# Altium PCB Paw2.PcbDoc
Units mil, origin at the board's own origin, x right, y up, seen from the top; angles counter-clockwise.
Board outline 2010 x 2010 mil, 4 copper layers (Top Layer, Internal Plane 1, Internal Plane 2, Bottom Layer); 42 components, 69 nets, 203 pads, 0 vias.
Unrouted connection lines stored in the file: 127.
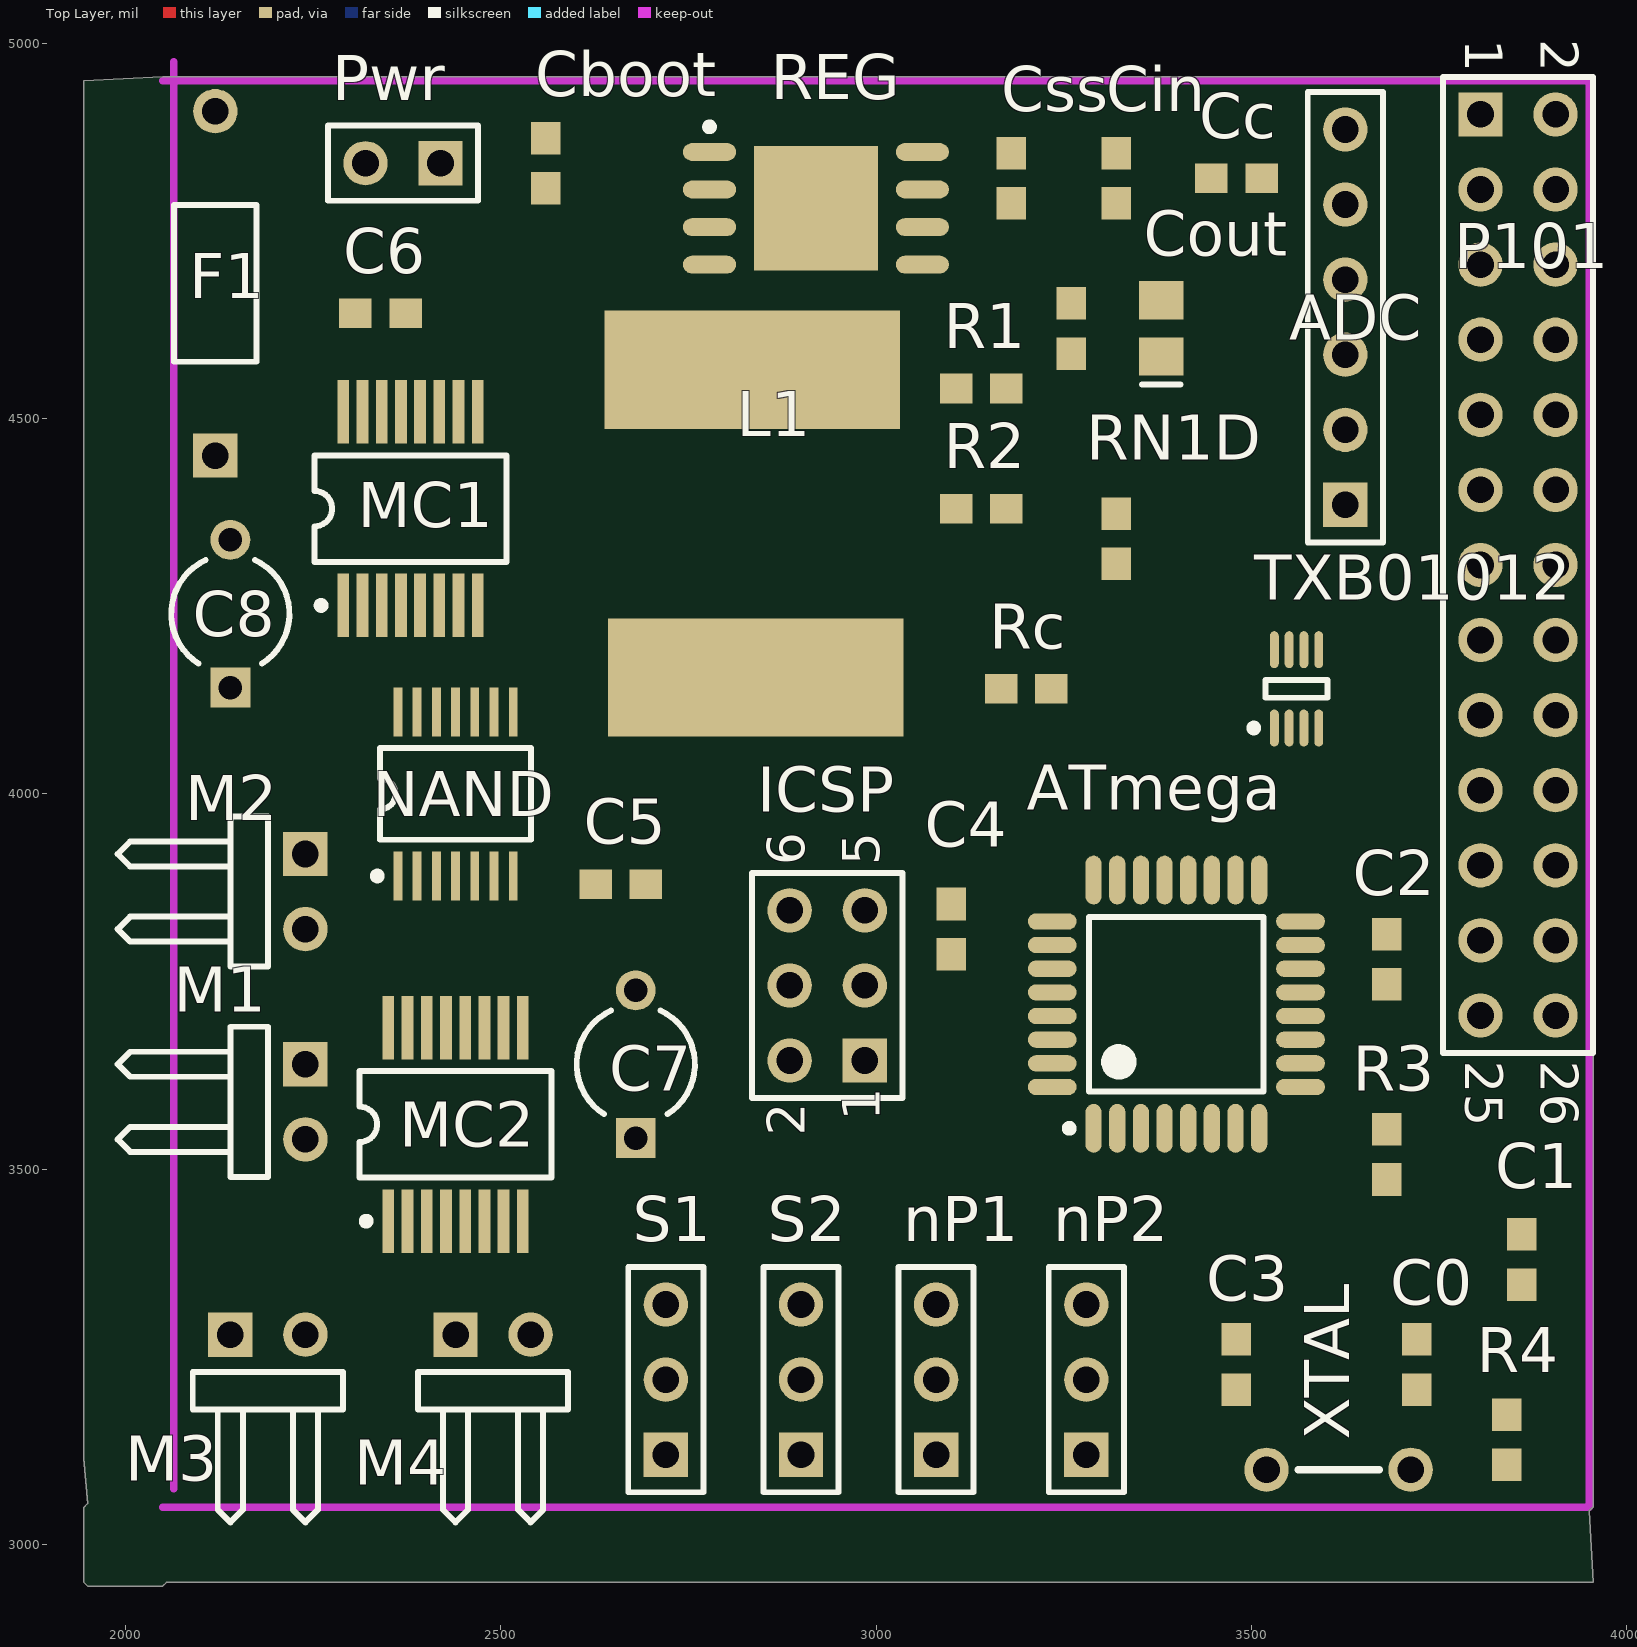
[diagram p0: Top Layer view]
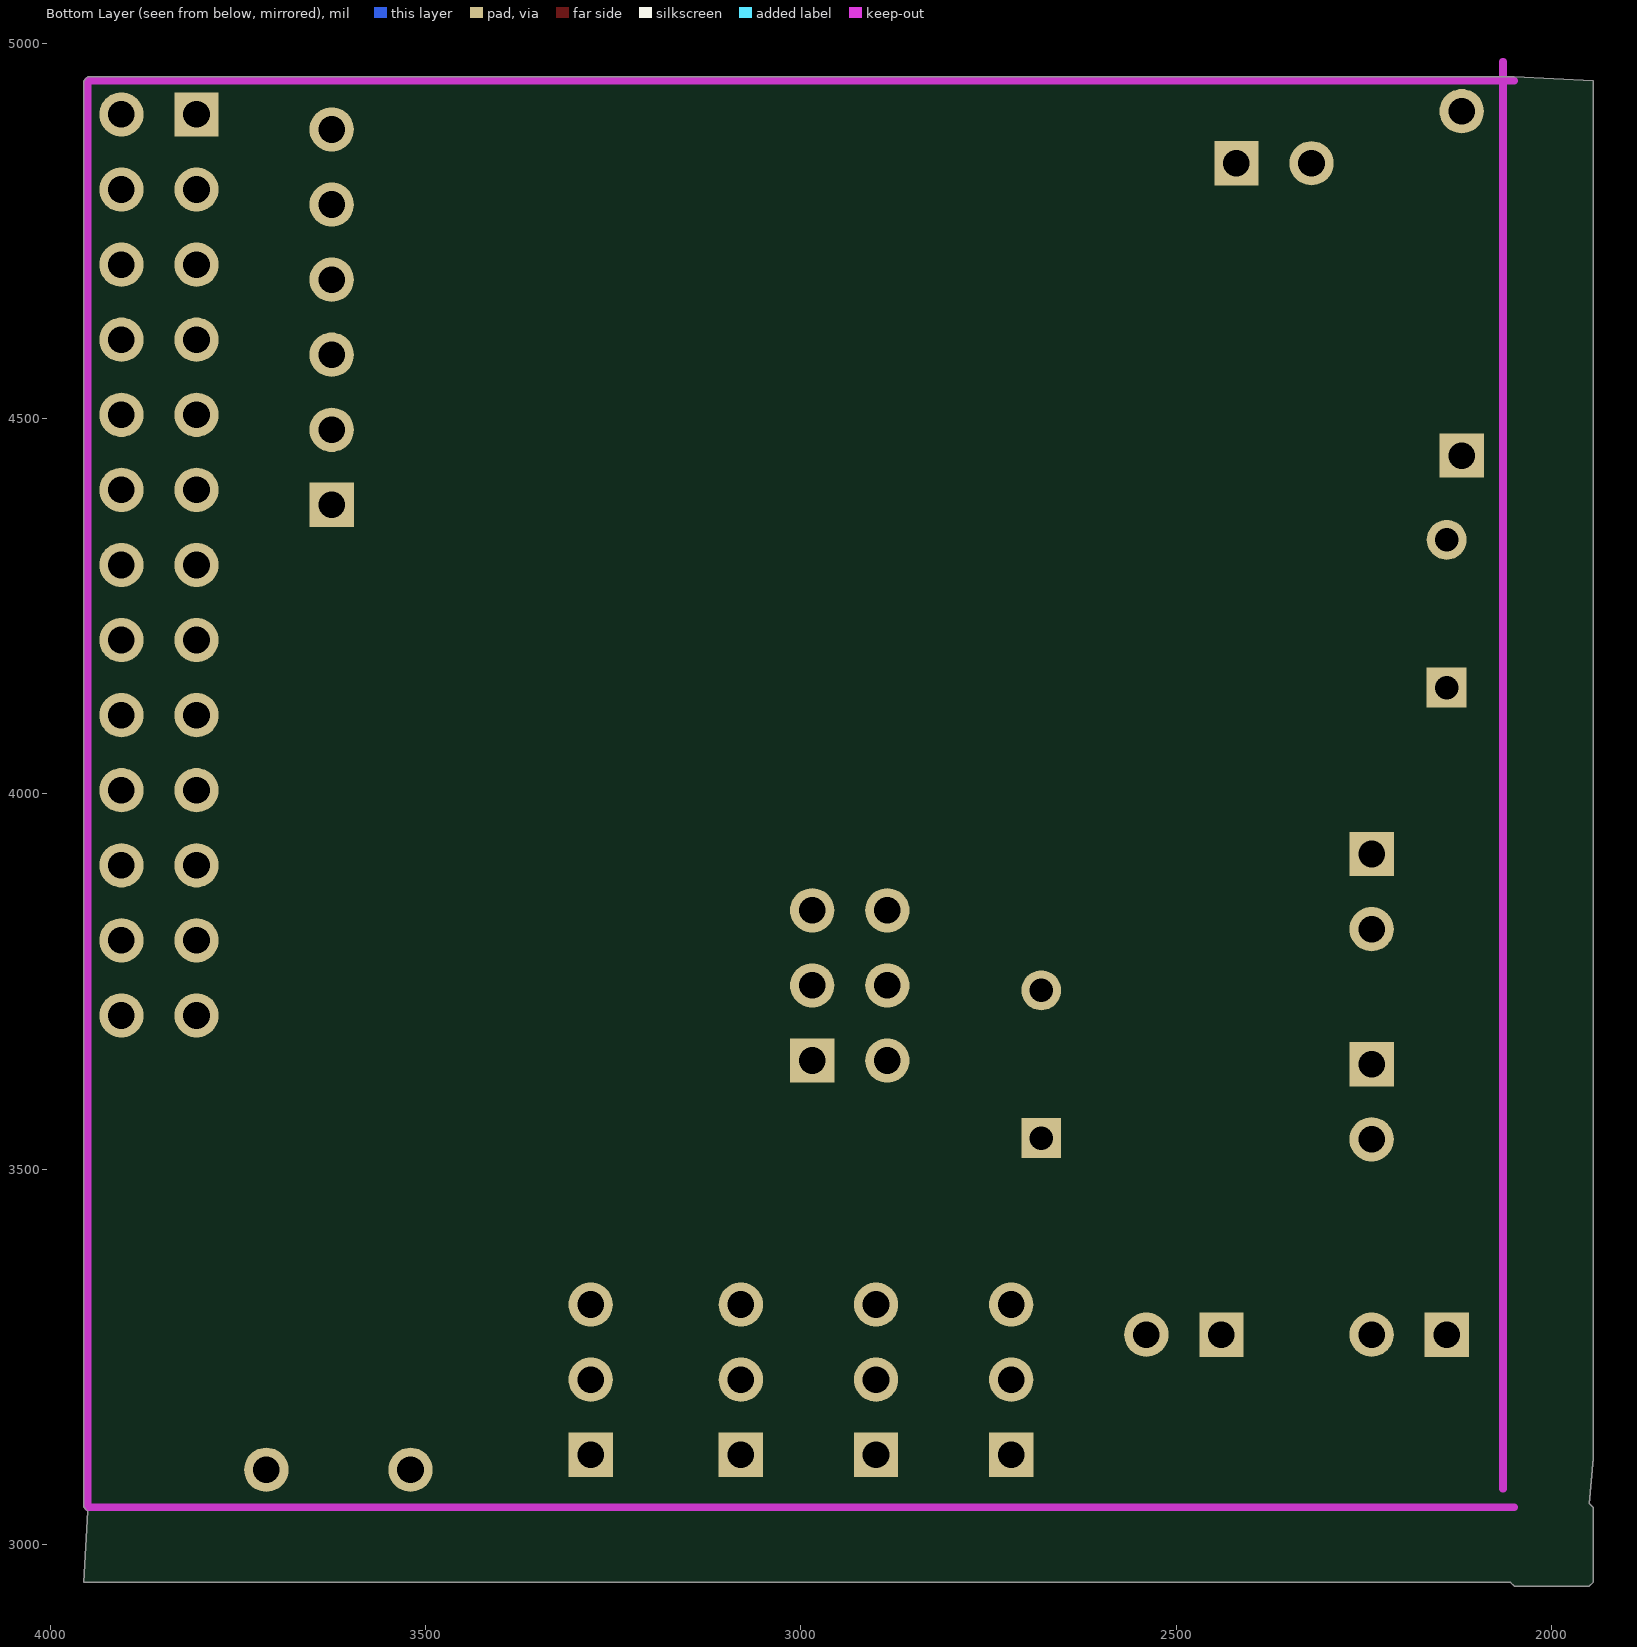
[diagram p1: Bottom Layer view, seen from below]
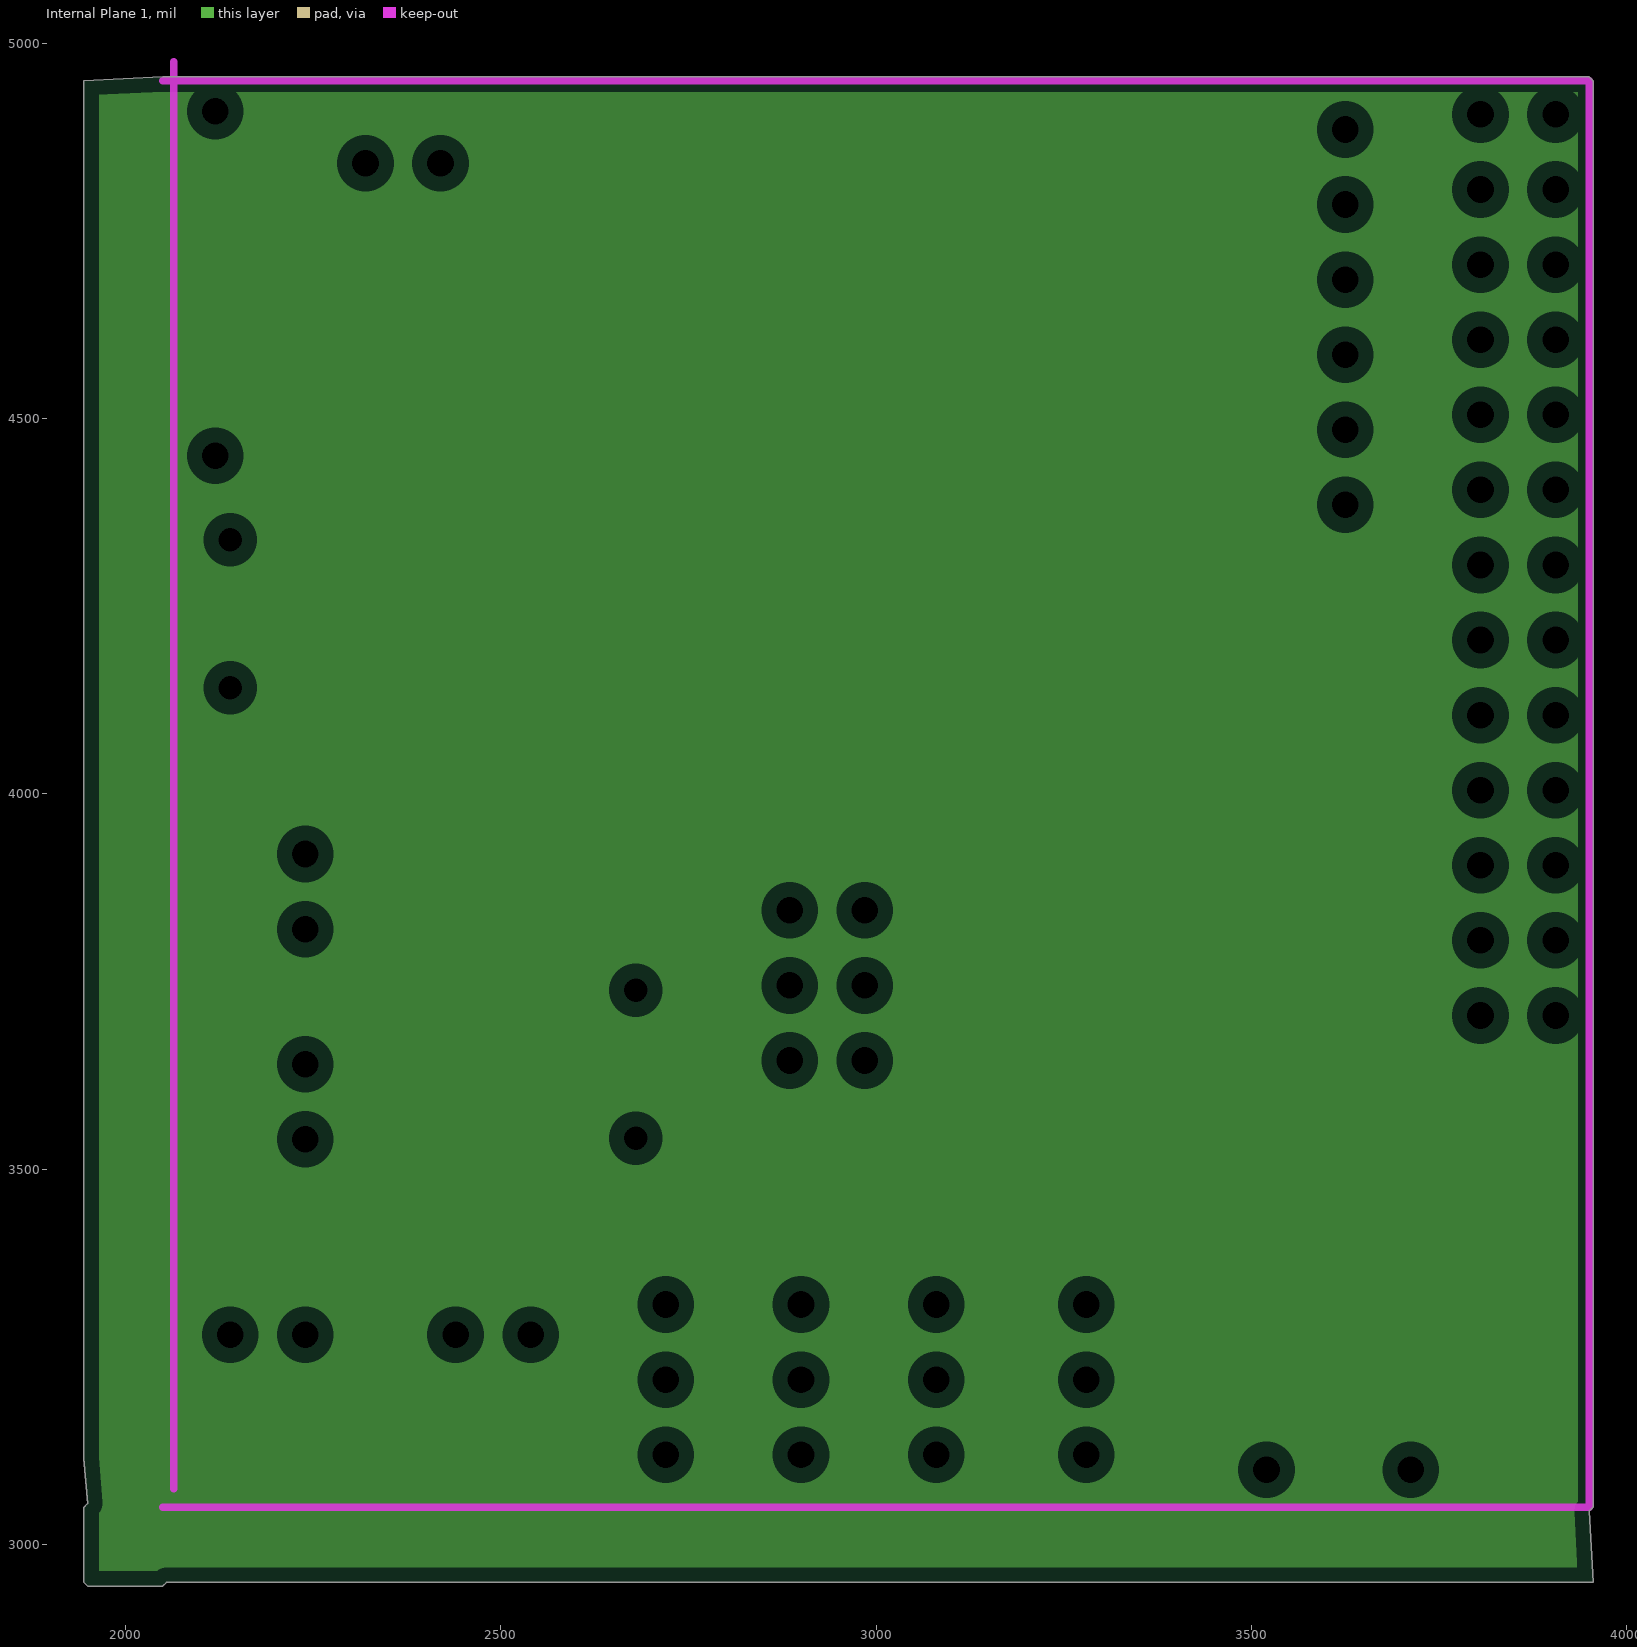
[diagram p2: Internal Plane 1, clearances drawn from the general rule]
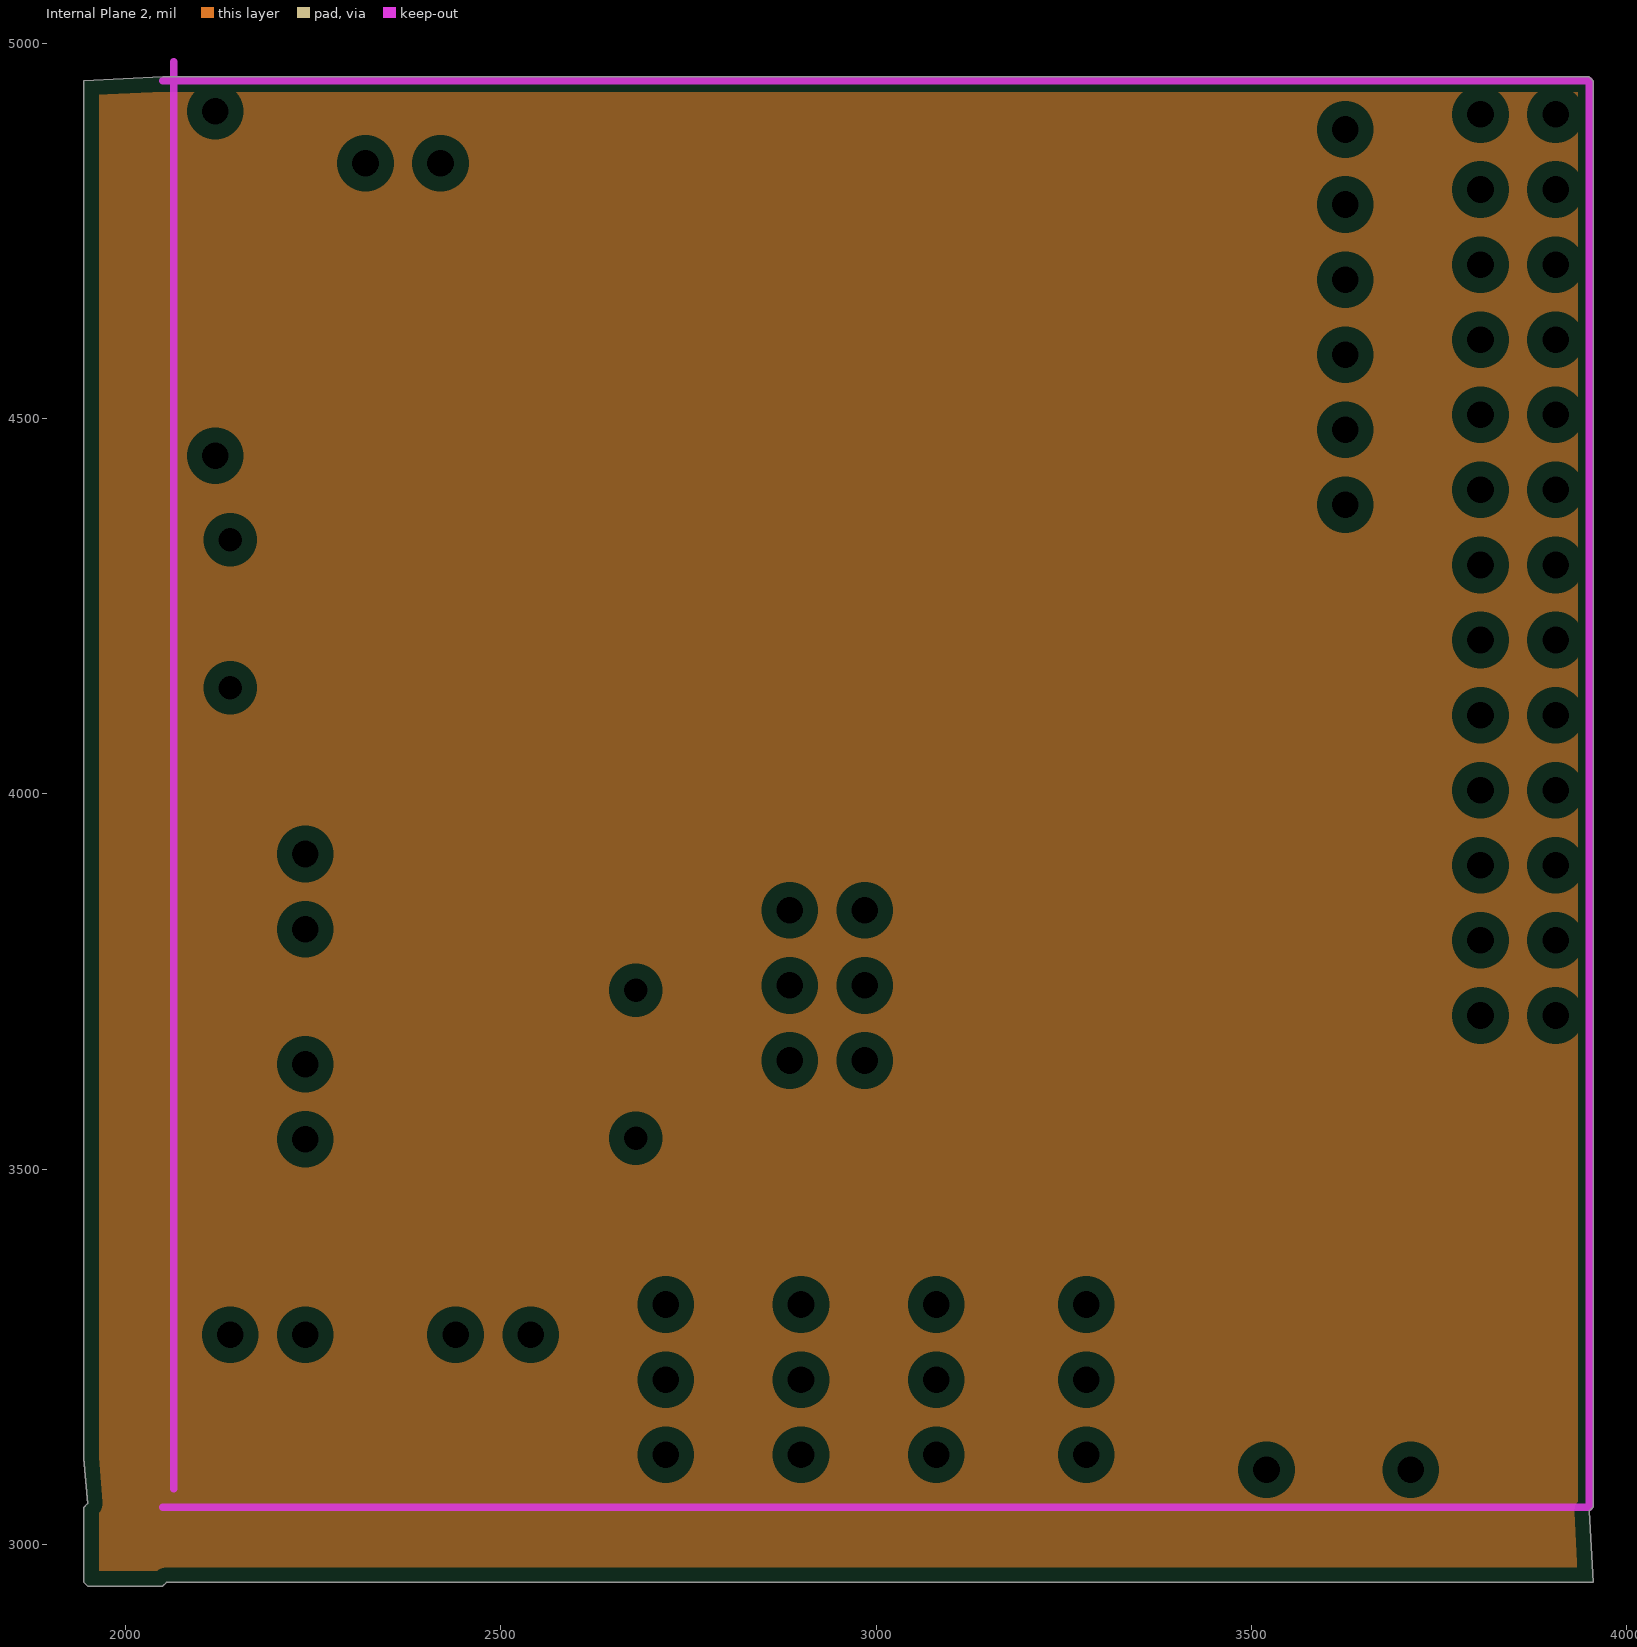
[diagram p3: Internal Plane 2, clearances drawn from the general rule]

## Layer stack, top to bottom
Top Layer: signal copper 1.4
Dielectric: dielectric 12.6, FR-4, Dk 4.8
Internal Plane 1: plane copper 1.4
Dielectric: dielectric 12.6, FR-4, Dk 4.8
Internal Plane 2: plane copper 1.4
Dielectric: dielectric 12.6, FR-4, Dk 4.8
Bottom Layer: signal copper 1.4

## Board outline
1945,2950 1950,2945 2050,2945 2055,2950 3955,2950 3950,3045 3955,3050 3955,4950 3950,4955 2050,4955 1945,4950 1945,3115 1950,3055 1945,3050

## Design rules (kind name [scope] priority, off if disabled: settings)
Clearance [All] p1: gap=8
PlaneClearance [All] p1: clearance=20
PlaneConnect [All] p1: planeconnectstyle=Relief reliefexpansion=20 reliefentries=4 reliefconductorwidth=10 reliefairgap=10
PolygonConnect [All] p1: connectstyle=Relief reliefconductorwidth=10 reliefentries=4 polygonreliefangle="90 Angle"
RoutingVias [All] p1: holewidth=25 width=40 viastyle="Through Hole" minholewidth=28 minwidth=50 maxholewidth=28 maxwidth=50
SilkscreenOverComponentPads [All] p1: minsilkscreentomaskgap=10
SolderMaskExpansion [All] p1: expansion=4
TestPointUsage [All] p1: valid=0 allowmultiple=FALSE
Testpoint [All] p1: side=15 testpointundercomponent=TRUE minsize=40 maxsize=100 preferedsize=60 minholesize=0 maxholesize=40 preferedholesize=32 testpointgrid=1 style=1023 order=0123456789
Width Width_2 [InNetClass('12V')] p1: maxlimit=10 minlimit=10 preferedwidth=10
Width Width_1 [InNetClass('Motor_Output')] p2: maxlimit=10 minlimit=10 preferedwidth=10
Width [All] p3: maxlimit=8 minlimit=8 preferedwidth=8
21 further rules are at their usual default settings.

## Classes and differential pairs
component class U_PwrSupply: Cboot Cc Cin Cout Css nP1 R1 R2 Rc REG
component class U_MotorDriverToshiba: C5 C6 C7 C8 M1 M2 M3 M4 MC1 MC2 NAND
component class RpiPaw1_Sch: ADC ATmega C0 C1 C2 C3 C4 F1 ICSP nP1 nP2 P101 Pwr R3 R4 RN1D S1 S2 TXB01012 XTAL
net class Motor_Output: NetM1_1 NetM1_2 NetM2_1 NetM2_2 NetM3_1 NetM3_2 NetM4_1 NetM4_2
net class 12V: NetF1_1 VBATT

## Components (designator, comment, footprint, x,y, rotation, side; value= is the part's Value field where it differs from the comment)
ADC "A0A4A5A6A7" HDR1X6 3625,4385 r90 top
ATmega "ATmega328P-AUR" TQFP32_N 3400,3720 r90 top (schematic designator "Arduino Clone")
C0 "" J1-0603 3720,3240 r90 top
C1 "" J1-0603 3860,3380 r90 top
C2 "Cap" J1-0603 3680,3780 r90 top
C3 "Cap" J1-0603 3480,3240 r90 top
C4 "Cap" J1-0603 3100,3820 r90 top
C5 "" J1-0603 2660,3880 r0 top
C6 "" J1-0603 2340,4640 r0 top
C7 "" CAPR5-4X5 2680,3640 r90 top
C8 "" CAPR5-4X5 2140,4240 r90 top
Cboot "" J1-0603 2560,4840 r90 top
Cc "" J1-0603 3480,4820 r0 top
Cin "" J1-0603 3320,4820 r90 top
Cout "" C0805 3380,4620 r90 top
Css "" J1-0603 3180,4820 r90 top
F1 "Fuse 1" PIN-W2/E2.8 2120,4680 r90 top
ICSP "Header 3X2" HDR2X3 2985,3645 r90 top
L1 "" Inductor_Paw 2840,4360 r90 top
M1 "Header 2H" HDR1X2H 2240,3640 r270 top
M2 "Header 2H" HDR1X2H 2240,3920 r270 top
M3 "Header 2H" HDR1X2H 2140,3280 r0 top
M4 "Header 2H" HDR1X2H 2440,3280 r0 top
MC1 "TB6552FNG" SSOP16 2380,4380 r0 top
MC2 "TB6552FNG" SSOP16 2440,3560 r0 top
NAND "MM74HC132MTC" TSSOP14 2440,4000 r0 top
nP1 "neoPix1" HDR1X3 3080,3120 r90 top (schematic designator LED1)
nP2 "neoPix2" HDR1X3 3280,3120 r90 top (schematic designator LED2)
P101 "Header 13X2" HDR2X13 3805,4905 r270 top
Pwr "Header 2" HDR1X2 2420,4840 r180 top
R1 "" J1-0603 3140,4540 r0 top
R2 "" J1-0603 3140,4380 r0 top
R3 "Res2" J1-0603 3680,3520 r90 top
R4 "Res2" J1-0603 3840,3140 r90 top
Rc "" J1-0603 3200,4140 r0 top
REG "RT8250GSP" SOP-8-C_N 2920,4780 r0 top (schematic designator 5VREG)
RN1D "Res2" J1-0603 3320,4340 r90 top
S1 "Servo1" HDR1X3 2720,3120 r90 top (schematic designator Servo1)
S2 "Servo2" HDR1X3 2900,3120 r90 top (schematic designator Servo2)
TXB01012 "TXB0102" TSSOP50P310X90-8N 3560,4140 r90 top
XTAL "XTAL" "Axial 0.2" 3520,3100 r0 top (schematic designator 16MHz)
? "Ren" J1-0603 3260,4620 r90 top

## Footprints (in the part's own frame and the unit in brackets; to place one, negate y for a bottom-side part, rotate by r counter-clockwise, add the part's x,y. Pads: shape width x height; smd on the part's side, far side on the other; paste and mask are expansions set on the pad)
"Axial 0.2" [mm]
  round 1.5 hole 0.9: 1(0,0) 2(4.877,0)
  silkscreen extent 1.07,0 3.81,0
C0805 [mm] "Chip Capacitor; Body 2.0 x 1.2 mm (LxW typ)"
  rect 1.3x1.5 smd: 1(-0.95,0) 2(0.95,0)
  silkscreen extent -1.9,-0.65 -1.9,0.65
CAPR5-4X5 [mm] "Capacitor; 2 Leads"
  rect 1.35x1.35 hole 0.8: 1(-2.5,0)
  round 1.35 hole 0.8: 2(2.5,0)
  silkscreen extent -1.69,-2 1.82,2
HDR1X2 [mm] "Connector; Header; 2 Position"
  rect 1.5x1.5 hole 0.9: 1(0,0)
  round 1.5 hole 0.9: 2(2.54,0)
  silkscreen extent -1.27,-1.27 3.81,1.27
HDR1X2H [mm] "Connector; Header; 2 Position; Right Angle"
  rect 1.5x1.5 hole 0.9: 1(0,0)
  round 1.5 hole 0.9: 2(2.54,0)
  silkscreen extent -1.27,-6.35 3.81,-1.27
HDR1X3 [mm] "Connector; Header; 3 Position"
  rect 1.5x1.5 hole 0.9: 1(0,0)
  round 1.5 hole 0.9: 2(2.54,0) 3(5.08,0)
  silkscreen extent -1.27,-1.27 6.35,1.27
HDR1X6 [mm] "Connector; Header; 6 Position"
  rect 1.5x1.5 hole 0.9: 1(0,0)
  round 1.5 hole 0.9: 2(2.54,0) 3(5.08,0) 4(7.62,0) 5(10.16,0) 6(12.7,0)
  silkscreen extent -1.27,-1.27 13.97,1.27
HDR2X3 [mm] "Connector; Header; 3x2 Position"
  rect 1.5x1.5 hole 0.9: 1(0,0)
  round 1.5 hole 0.9: 2(0,2.54) 3(2.54,0) 4(2.54,2.54) 5(5.08,0) 6(5.08,2.54)
  silkscreen extent -1.27,-1.27 6.35,3.81
HDR2X13 [mm] "Connector; Header; 13x2 Position"
  rect 1.5x1.5 hole 0.9: 1(0,0)
  round 1.5 hole 0.9: 2(0,2.54) 3(2.54,0) 4(2.54,2.54) 5(5.08,0) 6(5.08,2.54) 7(7.62,0) 8(7.62,2.54) 9(10.16,0) 10(10.16,2.54) 11(12.7,0) 12(12.7,2.54) 13(15.24,0) 14(15.24,2.54) 15(17.78,0) 16(17.78,2.54) 17(20.32,0) 18(20.32,2.54) 19(22.86,0) 20(22.86,2.54) 21(25.4,0) 22(25.4,2.54) 23(27.94,0) 24(27.94,2.54) 25(30.48,0) 26(30.48,2.54)
  silkscreen extent -1.27,-1.27 31.75,3.81
Inductor_Paw [mm]
  rect 4x10 smd: 1(-5.207,0) 2(5.207,0.127)
  body extent -4.77,-4.36 4.19,4.62, height 4
J1-0603 [mm] "Chip Resistor; Body 1.6 x 0.8 mm (LxW typ)"
  rect 1.1x1 smd: 1(-0.85,0) 2(0.85,0)
PIN-W2/E2.8 [mm] "Fuse; 2 Leads"
  rect 1.5x1.5 hole 0.9: 1(-5.825,0)
  round 1.5 hole 0.9: 2(5.825,0)
  silkscreen extent -2.65,-1.4 2.65,1.4
SOP-8-C_N [mm] "8-Pin Small Outline Package 1.27 mm Pitch, IPC Medium Density"
  oval 1.8x0.6 smd: 1(-3.6,1.905) 2(-3.6,0.635) 3(-3.6,-0.635) 4(-3.6,-1.905) 5(3.6,-1.905) 6(3.6,-0.635) 7(3.6,0.635) 8(3.6,1.905)
  rect 4.2x4.2 smd: 9(0,0)
  silkscreen extent -3.72,2.63 -3.47,2.88, body extent -2.11,-2.28 2.11,2.28, height 1.45
SSOP16 [mm] "SSOP; 16 Leads; Body Width 5.3 mm; Pitch 0.65 mm"
  rect 0.4x2.15 smd: 1(-2.275,-3.275) 2(-1.625,-3.275) 3(-0.975,-3.275) 4(-0.325,-3.275) 5(0.325,-3.275) 6(0.975,-3.275) 7(1.625,-3.275) 8(2.275,-3.275) 9(2.275,3.275) 10(1.625,3.275) 11(0.975,3.275) 12(0.325,3.275) 13(-0.325,3.275) 14(-0.975,3.275) 15(-1.625,3.275) 16(-2.275,3.275)
  silkscreen extent -3.25,-3.4 3.25,1.8
TQFP32_N [mm] "32-Pin Plastic Thin Quad Flat Pack (TFQP32), IPC Medium Density"
  oval 1.65x0.55 smd: 1(-4.2,2.8) 2(-4.2,2) 3(-4.2,1.2) 4(-4.2,0.4) 5(-4.2,-0.4) 6(-4.2,-1.2) 7(-4.2,-2) 8(-4.2,-2.8) 17(4.2,-2.8) 18(4.2,-2) 19(4.2,-1.2) 20(4.2,-0.4) 21(4.2,0.4) 22(4.2,1.2) 23(4.2,2) 24(4.2,2.8)
  oval 0.55x1.65 smd: 9(-2.8,-4.2) 10(-2,-4.2) 11(-1.2,-4.2) 12(-0.4,-4.2) 13(0.4,-4.2) 14(1.2,-4.2) 15(2,-4.2) 16(2.8,-4.2) 25(2.8,4.2) 26(2,4.2) 27(1.2,4.2) 28(0.4,4.2) 29(-0.4,4.2) 30(-1.2,4.2) 31(-2,4.2) 32(-2.8,4.2)
  silkscreen extent -4.32,-2.95 2.95,3.75, body extent -3.5,-3.5 3.5,3.5, height 1.2
TSSOP14 [mm] "Shrink Small Outline; 14 Leads; Body Width 4.4 mm; Pitch 0.65 mm"
  rect 0.3x1.65 smd: 1(-1.95,-2.775) 2(-1.3,-2.775) 3(-0.65,-2.775) 4(0,-2.775) 5(0.65,-2.775) 6(1.3,-2.775) 7(1.95,-2.775) 8(1.95,2.775) 9(1.3,2.775) 10(0.65,2.775) 11(0,2.775) 12(-0.65,2.775) 13(-1.3,2.775) 14(-1.95,2.775)
  silkscreen extent -2.77,-2.9 2.55,1.55
TSSOP50P310X90-8N [mm] "TSSOP, 8-Leads, Body 2.1x2.4mm (max), Pitch 0.50mm, IPC Medium Density"
  oval 1.25x0.3 smd: 1(-1.325,0.75) 2(-1.325,0.25) 3(-1.325,-0.25) 4(-1.325,-0.75) 5(1.325,-0.75) 6(1.325,-0.25) 7(1.325,0.25) 8(1.325,0.75)
  silkscreen extent -1.45,-1.05 0.3,1.57, body extent -1.2,-1.05 1.2,1.05, height 0.9

## Part data
ADC: library part "Header 6", "Header, 6-Pin"
ATmega: "8-bit AVR Microcontroller, 32KB Flash, 1KB EEPROM, 2KB SRAM, 32-pin TQFP, Industrial Grade (-40°C to 85°C)"
C0 C1: library part Cap, "Capacitor"
C2 C3 C4: "Capacitor"
C5 C6 Cboot Cc Cin Cout Css: library part CAP, "Capacitor"
C7 C8: library part Cap2, "Capacitor"
F1: "Fuse"
ICSP: "Header, 3-Pin, Dual row"
L1: library part Inductor, "Inductor"
M1 M2 M3 M4: "Header, 2-Pin, Right Angle"
MC1 MC2: "2CH 1A PMIC"
NAND: "4Ch NAND Gate"
nP1 nP2 S1 S2: library part "Header 3", "Header, 3-Pin"
P101: "Header, 13-Pin, Dual row"
Pwr: "Header, 2-Pin"
R1 R2 Rc ?: library part Res3, "Resistor"
R3 R4 RN1D: "Resistor"
REG: "3A 5V Buck Regulator"
TXB01012: "3.3V Level translator"
XTAL: "Crystal Oscillator"

## Nets (pads, with @x,y where several pads share a name; then routed paths per layer and width w, separated by ;. In a path a pad name is that pad's centre, name@x,y a point inside that pad or via, vN(x,y) a via of type N, cw(c..) or ccw(c..) an arc to the next point about the centre after c; other vN are vias at no path point)
+3.3V: P101.1 TXB01012.3
+5V: ATmega.4 ATmega.6 C2.2 C3.2 C5.2 C6.2 ICSP.2 MC1.16 MC2.16 nP1.2 nP2.2 P101.2 R3.2 RN1D.2 S1.2 S2.2 TXB01012.6 TXB01012.7
GND: ADC.6 ATmega.3 ATmega.5 ATmega.21 C0.1 C1.1 C2.1 C3.1 C4.1 C5.1 C6.1 C7.2 C8.2 Cin.1 Cout.1 Css.1 ICSP.6 MC1.1 MC1.9 MC2.1 MC2.9 NAND.7 nP1.3 nP2.3 P101.6 Pwr.1 R2.1 Rc.1 REG.4 REG.9 S1.3 S2.3 TXB01012.2
GPIO0(SDA): P101.3
GPIO1(SCL): P101.5
GPIO4: P101.7
GPIO7(CE1): P101.26
GPIO8(CE0): P101.24
GPIO9(MISO): P101.21
GPIO10(MOSI): P101.19
GPIO17: P101.11
GPIO18: P101.12
GPIO21: P101.13
GPIO22: P101.15
GPIO23: P101.16
GPIO24: P101.18
GPIO25: P101.22
GPIO(SCLK): P101.23
MISO: ATmega.16 ICSP.1
MOSI: ATmega.15 ICSP.4 S2.1
Net5VREG_1: Cboot.2 REG.1
Net5VREG_3: Cboot.1 L1.1 REG.3
Net5VREG_5: R1.1 R2.2 REG.5
Net5VREG_6: Cc.1 REG.6
Net5VREG_8: Css.2 REG.8
Net16MHz_1: ATmega.7 C0.2 R4.2 XTAL.1
Net16MHz_2: ATmega.8 C1.2 R4.1 XTAL.2
Net_1: ?.1 REG.7
NetADC_1: ADC.1 ATmega.23
NetADC_2: ADC.2 ATmega.27
NetADC_3: ADC.3 ATmega.28
NetADC_4: ADC.4 ATmega.19
NetADC_5: ADC.5 ATmega.22
"NetArduino Clone_1": ATmega.1 MC1.4
"NetArduino Clone_2": ATmega.2 MC1.15 NAND.4 NAND.5
"NetArduino Clone_9": ATmega.9 MC1.13
"NetArduino Clone_10": ATmega.10 MC2.4
"NetArduino Clone_11": ATmega.11 MC2.2 NAND.9 NAND.10
"NetArduino Clone_12": ATmega.12 MC2.15 NAND.12 NAND.13
"NetArduino Clone_13": ATmega.13 MC2.13
"NetArduino Clone_14": ATmega.14 S1.1
"NetArduino Clone_18": ATmega.18 R3.1
"NetArduino Clone_20": ATmega.20 C4.2
"NetArduino Clone_24": ATmega.24 nP1.1
"NetArduino Clone_25": ATmega.25 MC1.5 MC1.12 MC2.5 MC2.12
"NetArduino Clone_26": ATmega.26 nP2.1
"NetArduino Clone_30": ATmega.30 TXB01012.8
"NetArduino Clone_31": ATmega.31 TXB01012.1
"NetArduino Clone_32": ATmega.32 MC1.2 NAND.1 NAND.2
NetCc_2: Cc.2 Rc.2
NetCout_2: Cout.2 L1.2 R1.2
NetF1_1: F1.1 Pwr.2
NetM1_1: M1.1 MC1.7
NetM1_2: M1.2 MC1.8
NetM2_1: M2.1 MC1.11
NetM2_2: M2.2 MC1.10
NetM3_1: M3.1 MC2.7
NetM3_2: M3.2 MC2.8
NetM4_1: M4.1 MC2.11
NetM4_2: M4.2 MC2.10
NetMC1_3: MC1.3 NAND.3
NetMC1_14: MC1.14 NAND.6
NetMC2_3: MC2.3 NAND.8
NetMC2_14: MC2.14 NAND.11
RESET: ATmega.29 ICSP.5 RN1D.1
RXD: P101.10 TXB01012.5
SCK: ATmega.17 ICSP.3
TXD: P101.8 TXB01012.4
VBATT: ?.2 C7.1 C8.1 Cin.2 F1.2 MC1.6 MC2.6 REG.2
pads on no net: NAND.14 P101.4 P101.9 P101.14 P101.17 P101.20 P101.25

## Polygon pours and split planes (outlines as drawn)
no net on Internal Plane 1 (split plane): 3934.9,3058.23 3934.21,3057.28 3933.29,3056.17 3933.04,3055.7 3932.73,3055.27 3932.11,3053.96 3931.43,3052.69 3931.28,3052.18 3931.05,3051.7 3930.71,3050.3 3930.29,3048.92 3930.24,3048.39 3930.11,3047.88 3930.04,3046.44 3929.9,3045 3929.96,3044.47 3929.93,3043.94 3933.82,2970.1 2055,2970.1 2051.08,2969.71 2047.31,2968.57 2043.83,2966.71 2041.87,2965.1 1965.1,2965.1 1965.1,3041.78 1965.34,3042.02 1965.99,3042.96 1966.71,3043.83 1967.1,3044.57 1967.58,3045.26 1968.03,3046.31 1968.57,3047.31 1968.81,3048.11 1969.14,3048.88 1969.38,3049.99 1969.71,3051.08 1969.79,3051.91 1969.97,3052.73 1969.99,3053.87 1970.1,3055 1970.01,3055.83 1970.03,3056.67 1965.1,3115.84 1965.1,4930.84 2050.48,4934.9 3934.9,4934.9
no net on Internal Plane 2 (split plane): 3934.9,3058.23 3934.21,3057.28 3933.29,3056.17 3933.04,3055.7 3932.73,3055.27 3932.11,3053.96 3931.43,3052.69 3931.28,3052.18 3931.05,3051.7 3930.71,3050.3 3930.29,3048.92 3930.24,3048.39 3930.11,3047.88 3930.04,3046.44 3929.9,3045 3929.96,3044.47 3929.93,3043.94 3933.82,2970.1 2055,2970.1 2051.08,2969.71 2047.31,2968.57 2043.83,2966.71 2041.87,2965.1 1965.1,2965.1 1965.1,3041.78 1965.34,3042.02 1965.99,3042.96 1966.71,3043.83 1967.1,3044.57 1967.58,3045.26 1968.03,3046.31 1968.57,3047.31 1968.81,3048.11 1969.14,3048.88 1969.38,3049.99 1969.71,3051.08 1969.79,3051.91 1969.97,3052.73 1969.99,3053.87 1970.1,3055 1970.01,3055.83 1970.03,3056.67 1965.1,3115.84 1965.1,4930.84 2050.48,4934.9 3934.9,4934.9

## Keep-outs
Keep-Out Layer:
  lines w10: 2050,3050 3950,3050 3950,4950 2050,4950 ; 2065,3075 2065,4975

## Text inside footprints (layer, text, board x,y; h text height)
ICSP: Top Overlay "6" at 2905,3905 h50 r90; Top Overlay "5" at 3005,3905 h50 r90; Top Overlay "2" at 2905,3545 h50 r90; Top Overlay "1" at 3005,3565 h50 r90
P101: Top Overlay "26" at 3885,3645 h50 r270; Top Overlay "25" at 3785,3645 h50 r270; Top Overlay "1" at 3785,5005 h50 r270; Top Overlay "2" at 3885,5005 h50 r270